# Altium PCB Rascal.PcbDoc (part 3 of 3)
Units mm, origin at the board's own origin, x right, y up, seen from the top; angles counter-clockwise.
Board outline 120.65 x 53.34 mm, 4 copper layers (Top Layer, Ground Plane, Power Plane, Bottom Layer); 125 components, 215 nets, 799 pads, 528 vias.
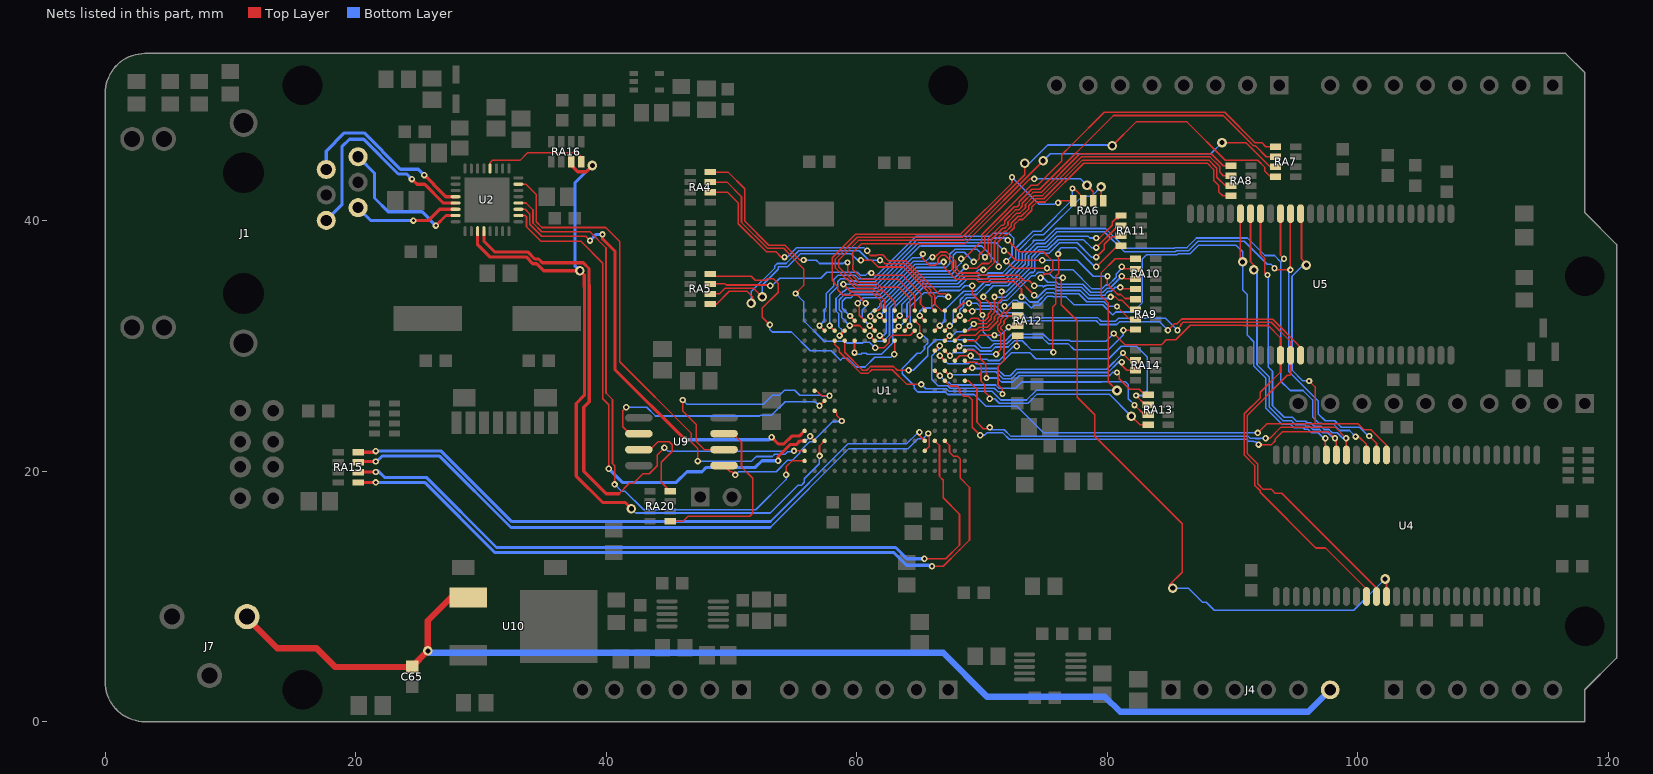
[diagram p5: the nets of this part, all layers, seen from the top]

## Via types
v1: diameter 0.508, hole 0.254, Top Layer to Bottom Layer, 343 vias
v2: diameter 0.762, hole 0.406, Top Layer to Bottom Layer, 170 vias
v3: diameter 0.66, hole 0.33, Top Layer to Bottom Layer, tented top, 9 vias
v4: diameter 2.3, hole 2.3, Top Layer to Bottom Layer, 4 vias
v5: diameter 1.524, hole 0.889, Top Layer to Bottom Layer, 2 vias

## Nets (pads, with @x,y where several pads share a name; then routed paths per layer and width w, separated by ;. In a path a pad name is that pad's centre, name@x,y a point inside that pad or via, vN(x,y) a via of type N, cw(c..) or ccw(c..) an arc to the next point about the centre after c; other vN are vias at no path point) (continued)
NetRA4_2: RA4.2 U1.E2 | length 28.3
  Top Layer w0.127: RA4.2@48.298,42.272 49.676,42.272 50.546,41.402 50.546,39.751 52.768,37.529 53.53,37.529 53.975,37.084 v1(54.229,37.084) ; v1(60.833,37.592) 60.833,37.465 61.087,37.211 61.601,37.211 61.665,37.274 62.068,37.274 62.538,36.805 63.924,36.805 66.566,34.163 67.056,34.163 v1(67.31,33.909) ; v1(65.024,32.416) 65.424,32.016 U1.E2@65.43,32.016
  Bottom Layer w0.127: v1(54.229,37.084) 54.445,37.084 55.207,37.846 60.579,37.846 v1(60.833,37.592) v1@60.833,37.465 ; v1@65.024,32.385 v1(65.024,32.416) 65.024,32.766 65.278,33.02 65.907,33.02 66.23,33.344 66.23,33.712 66.491,33.972 66.859,33.972 66.923,33.909 v1(67.31,33.909)
NetRA4_3: RA4.3 U1.F3 | length 26.9
  Top Layer w0.127: RA4.3@48.298,43.072 49.638,43.072 50.8,41.91 50.8,39.856 52.874,37.782 54.159,37.782 54.673,37.268 54.673,37.245 55.753,36.166 55.753,34.819 v1(55.118,34.184) ; v1(61.468,29.845) 62.18,29.845 62.598,30.263 62.598,30.594 62.852,30.848 64.262,30.848 U1.F3@64.63,31.216
  Bottom Layer w0.127: v1(55.118,34.184) 55.753,33.549 55.753,32.025 57.4,30.378 ; 57.4,30.374 58.267,30.374 58.27,30.371 59.054,30.371 59.199,30.226 60.458,30.226 60.522,30.29 61.023,30.29 v1(61.468,29.845) v1@61.329,29.845
NetRA4_4: RA4.4 U1.G2 | length 24
  Top Layer w0.127: RA4.4@48.298,43.872 49.727,43.872 51.054,42.545 51.054,39.961 52.979,38.036 54.264,38.036 55.471,36.83 v1@55.753,36.83 ; v1(59.263,36.657) 59.263,35.987 59.334,35.916 59.338,35.916 59.896,35.358 59.896,35.354 60.198,35.052 61.53,35.052 61.911,34.671 63.373,34.671 64.23,33.814 64.23,32.416 U1.G2@63.83,32.016
  Bottom Layer w0.127: v1@55.753,36.83 56.769,36.83 57.023,36.576 58.928,36.576 59.009,36.657 v1(59.263,36.657)
  other v1: 55.753,36.851
NetRA5_1: RA5.1 U1.C1 | length 25
  Top Layer w0.127: RA5.1@48.098,33.344 RA5.1@48.298,33.344 48.814,33.344 49.823,34.353 51.244,34.353 51.689,33.909 v2@51.689,33.528 ; v1(61.849,36.83) 61.976,36.83 62.255,36.551 63.819,36.551 65.913,34.457 65.913,34.335 66.23,34.017 66.23,33.344 66.758,32.816 U1.C1@67.03,32.816
  Bottom Layer w0.127: v2(51.562,33.401) 51.562,34.312 53.467,36.217 53.467,36.403 53.64,36.576 54.357,36.576 55.373,37.592 60.198,37.592 60.96,36.83 v1(61.849,36.83) v1@61.976,36.83
NetRA5_2: RA5.2 U1.D1 | length 22.9
  Top Layer w0.127: RA5.2@48.298,34.144 49.025,34.144 49.488,34.608 51.752,34.608 v2(52.451,33.909) ; v1(60.325,36.83) 61.172,36.83 61.705,36.297 63.714,36.297 65.659,34.352 65.659,34.23 65.977,33.912 65.977,33.069 U1.D1@66.23,32.816
  Bottom Layer w0.127: v2(52.451,33.909) 52.451,34.842 53.721,36.112 53.721,36.298 53.745,36.322 54.462,36.322 55.478,37.338 59.563,37.338 60.071,36.83 v1(60.325,36.83)
NetRA5_3: RA5.3 U1.E1 | length 20
  Top Layer w0.127: RA5.3@48.298,34.944 49.511,34.944 49.593,34.861 53.037,34.861 v1@53.086,34.813 ; v1(61.163,35.817) 61.163,35.763 61.087,35.687 61.138,35.636 63.656,35.636 65.151,34.141 65.151,33.776 65.087,33.712 65.087,33.34 65.43,32.998 U1.E1@65.43,32.816
  Bottom Layer w0.127: v1(53.086,34.798) 53.236,34.798 53.842,35.404 57.121,35.404 57.594,35.877 60.065,35.877 60.319,35.623 60.687,35.623 60.941,35.877 61.103,35.877 v1(61.163,35.817) ; v1@61.189,35.662 v1@61.214,35.687
NetRA5_4: RA5.4 U1.H4 | length 23
  Top Layer w0.127: RA5.4@48.304,35.56 51.584,35.56 51.901,35.242 52.722,35.242 52.849,35.369 53.323,35.369 53.721,34.971 53.721,34.29 52.451,33.02 52.451,32.294 v1(53.062,31.683) ; v1@63.03,29.375 U1.H4@63.03,30.416
  Bottom Layer w0.127: v1(53.062,31.683) 53.062,31.3 53.254,31.108 54.783,31.108 56.279,29.612 57.952,29.612 58.702,28.862 58.866,29.026 59.267,29.026 59.984,28.309 60.662,28.309 61.436,29.083 62.738,29.083 v1(62.992,29.337)
NetRA6_1: RA6.1 U1.H3 | length 23.6
  Top Layer w0.127: U1.H3@63.03,31.216 v1@63.353,31.539 ; v2(79.502,42.693) 79.502,41.772 RA6.1@79.686,41.588
  Bottom Layer w0.127: v1@63.43,31.553 64.008,32.131 64.008,33.364 65.353,34.708 68.171,34.708 68.769,35.306 70.042,35.306 70.106,35.369 70.393,35.369 70.584,35.56 71.739,35.56 72.943,36.764 72.943,37.637 74.189,38.883 74.93,38.883 77.978,41.931 78.74,41.931 v2(79.502,42.693)
  other v1: 63.348,31.545
NetRA6_2: RA6.2 U1.F1 | length 31.1
  Top Layer w0.127: 59.69,36.455 59.69,36.068 60.452,35.306 63.313,35.306 64.633,33.986 64.633,32.816 U1.F1@64.63,32.816 ; 59.69,36.858 59.69,37.465 60.389,38.163 68.644,38.163 73.808,43.328 v1(74.168,43.328) ; 59.707,36.473 59.707,36.841 ; v2(78.378,42.82) 78.886,42.312 RA6.2@78.886,41.588
  Bottom Layer w0.127: v1(74.168,43.328) 77.87,43.328 v2(78.378,42.82)
NetRA6_3: RA6.3 U1.H2 | length 21.1
  Top Layer w0.127: U1.H2@63.03,32.016 63.43,32.416 v1@63.433,32.413 ; v1(77.216,42.566) 77.364,42.418 77.491,42.418 RA6.3@77.978,41.931
  Bottom Layer w0.127: v1@63.433,32.413 63.43,32.416 63.579,32.565 63.579,33.294 65.247,34.962 68.066,34.962 68.663,35.56 69.596,35.56 69.659,35.623 70.288,35.623 70.479,35.814 71.633,35.814 72.689,36.869 72.689,37.785 74.041,39.137 74.676,39.137 77.216,41.677 v1(77.216,42.566)
  other v1: 63.433,32.416
NetRA6_4: RA6.4 U1.K3 | length 30.7
  Top Layer w0.127: 58.229,34.995 58.49,34.734 58.49,34.474 58.928,34.036 60.071,34.036 v1(60.706,33.401) ; 58.229,35.049 58.039,35.239 58.039,37.04 59.924,38.925 68.306,38.925 72.39,43.009 v1(72.39,43.455) ; v1(61.03,31.616) U1.K3@61.43,31.216 ; v1(76.073,41.423) 76.238,41.588 RA6.4@77.286,41.588
  Bottom Layer w0.127: 60.706,33.147 60.452,32.893 60.452,32.194 v1(61.03,31.616) ; v1(72.39,43.455) 74.549,41.296 75.819,41.296
NetRA7_1: RA7.1 U1.J4 | length 42.8
  Top Layer w0.127: v1(61.83,30.816) U1.J4@62.23,30.416 ; v1(68.326,36.957) 68.562,36.957 69.977,38.372 69.977,38.873 73.914,42.82 74.424,42.82 76.36,44.756 76.361,45.259 77.176,46.072 79.745,48.641 89.364,48.641 91.777,46.228 92.329,46.228 92.653,45.904 RA7.1@93.434,45.904
  Bottom Layer w0.127: v1(61.83,30.816) 62.116,30.816 62.357,31.057 62.357,33.149 64.932,35.724 67.579,35.724 67.962,36.107 67.962,36.254 68.326,36.618 v1(68.326,36.957)
NetRA7_2: RA7.2 U1.J2 | length 42.6
  Top Layer w0.127: v1(61.83,32.416) U1.J2@62.23,32.016 ; v1@69.428,36.617 69.787,36.975 69.787,37.268 70.231,37.713 70.231,38.768 72.569,41.106 72.813,41.106 72.962,41.254 72.962,41.498 73.966,42.503 74.612,42.503 80.497,48.387 89.259,48.387 91.672,45.974 91.821,45.974 92.691,45.104 RA7.2@93.434,45.104
  Bottom Layer w0.127: v1(61.83,32.416) 62.103,32.689 62.103,33.255 64.827,35.978 67.474,35.978 67.708,36.212 67.708,37.228 67.945,37.465 68.568,37.465 69.33,36.703 v1(69.342,36.703)
NetRA7_3: RA7.3 U1.H1 | length 46.6
  Top Layer w0.127: U1.H1@63.03,32.816 U1.H1@63.03,32.931 ; U1.H1@63.066,32.816 63.066,33.454 62.103,34.417 61.805,34.417 61.424,34.798 60.071,34.798 59.642,35.227 59.642,35.252 59.233,35.662 59.207,35.662 58.547,36.322 58.547,36.83 60.134,38.417 68.516,38.417 v2(74.876,44.777) ; v2(89.154,46.228) 91.059,46.228 92.983,44.304 RA7.3@93.434,44.304
  Bottom Layer w0.127: v2(74.876,44.777) 75.438,45.339 88.265,45.339 v2(89.154,46.228)
NetRA7_4: RA7.4 U1.J1 | length 48.8
  Top Layer w0.127: U1.J1@62.23,32.816 62.219,32.805 62.219,33.666 61.722,34.163 61.7,34.163 61.319,34.544 59.966,34.544 59.388,35.121 59.388,35.147 59.128,35.408 59.102,35.408 58.293,36.217 58.293,36.935 60.029,38.672 68.411,38.672 73.406,43.666 v2(73.406,44.577) ; v2(80.391,45.974) 82.296,47.879 86.36,47.879 89.419,44.82 90.407,44.82 90.41,44.817 90.946,44.817 90.949,44.82 92.007,44.82 92.583,44.244 92.583,43.942 93.021,43.504 RA7.4@93.434,43.504
  Bottom Layer w0.127: v2(73.406,44.577) 73.787,44.577 75.248,46.038 80.328,46.038 v2(80.391,45.974)
NetRA8_1: RA8.1 U1.K2 | length 37.6
  Top Layer w0.127: v1@61.043,32.414 61.032,32.414 U1.K2@61.43,32.016 ; v1@70.116,36.945 70.485,37.314 70.485,38.576 71.553,39.644 71.71,39.644 71.819,39.752 71.819,39.996 72.674,40.852 72.928,40.852 73.215,41.139 73.215,41.393 74.071,42.249 74.718,42.249 77.808,45.339 88.305,45.339 89.264,44.38 RA8.1@89.878,44.38
  Bottom Layer w0.127: v1@61.03,32.416 61.032,32.414 v1@61.043,32.414 ; v1@61.116,32.331 61.116,32.627 61.429,32.94 61.584,32.94 61.844,33.2 61.844,33.355 64.748,36.258 67.113,36.258 67.428,36.573 67.428,37.307 67.84,37.719 69.596,37.719 v1(70.231,37.084)
  other v1: 61.087,32.36
NetRA8_2: RA8.2 U1.K4 | length 39.3
  Top Layer w0.127: v1@61.045,30.812 61.043,30.814 v1(61.03,30.812) U1.K4@61.468,30.378 ; v1(68.707,36.322) 68.834,36.195 69.596,36.195 69.977,36.576 70.55,36.576 70.739,36.765 70.739,38.471 71.658,39.39 71.816,39.39 72.072,39.647 72.072,39.891 72.779,40.598 73.033,40.598 73.469,41.034 73.469,41.288 74.176,41.995 74.823,41.995 77.913,45.085 88.2,45.085 88.99,44.295 88.99,43.852 89.262,43.58 RA8.2@89.878,43.58
  Bottom Layer w0.127: v1@61.045,30.812 61.043,30.814 v1(61.03,30.812) 61.493,30.353 62.103,30.353 62.611,30.861 62.611,33.044 65.037,35.47 67.855,35.47 v1(68.707,36.322)
NetRA8_3: RA8.3 U1.M4 | length 41.8
  Top Layer w0.127: U1.M4@59.83,30.416 59.817,30.429 v1(59.817,29.464) v1@59.944,29.591 ; v1(70.104,36.068) 70.402,36.068 70.993,36.659 70.993,38.366 71.763,39.136 71.921,39.136 72.326,39.542 72.326,39.786 72.884,40.344 73.138,40.344 73.724,40.929 73.724,41.183 74.281,41.741 74.928,41.741 78.019,44.831 88.094,44.831 88.736,44.189 88.736,43.471 89.427,42.78 RA8.3@89.878,42.78
  Bottom Layer w0.127: v1(59.817,29.464) 59.944,29.337 60.331,29.337 60.395,29.4 60.763,29.4 60.827,29.337 61.976,29.337 62.865,30.226 62.865,32.939 65.142,35.216 67.96,35.216 68.558,35.814 69.463,35.814 69.717,36.068 v1@70.021,36.068
NetRA8_4: RA8.4 U1.N3 | length 44.8
  Top Layer w0.127: v1(58.63,30.816) U1.N3@59.03,31.216 ; v1@71.23,36.212 71.23,36.537 71.247,36.554 71.247,38.261 71.868,38.882 72.026,38.882 72.581,39.436 72.581,39.68 72.99,40.09 73.244,40.09 73.977,40.823 73.977,41.077 74.387,41.487 75.033,41.487 78.124,44.577 87.989,44.577 88.482,44.084 88.482,43.217 88.9,42.799 88.9,42.291 89.211,41.98 RA8.4@89.878,41.98 ; v1(71.336,36.322) 71.336,36.233 v1@71.374,36.195
  Bottom Layer w0.127: v1(58.63,30.816) 58.801,30.987 58.801,31.3 58.547,31.554 58.547,32.581 58.34,32.787 58.34,33.78 58.914,34.353 58.991,34.353 59.245,34.608 61.292,34.608 61.295,34.611 61.663,34.611 65.025,37.972 ; 65.107,37.973 69.971,37.973 70.675,37.268 70.675,37.148 v1@71.374,36.449
NetRA9_1: RA9.1 U1.K1 | length 31.9
  Top Layer w0.127: v1@58.801,35.052 v1(58.928,34.925) 59.563,34.29 61.214,34.29 61.965,33.539 61.965,33.072 61.754,32.86 61.646,32.86 61.601,32.816 U1.K1@61.43,32.816 ; v1(71.755,37.592) 71.927,37.592 72.689,36.83 v1(74.803,36.83) ; v1(80.01,35.56) 80.01,34.925 80.831,34.104 81.085,34.104 81.407,33.782 RA9.1@82.258,33.782
  Bottom Layer w0.127: v1(58.928,34.925) 59.861,34.925 59.924,34.861 61.186,34.861 61.19,34.865 61.558,34.865 64.92,38.227 71.12,38.227 v1(71.755,37.592) ; v1(74.803,36.83) 77.597,36.83 78.867,35.56 v1(80.01,35.56)
NetRA9_2: RA9.2 U1.L3 | length 33
  Top Layer w0.127: v1@59.436,31.623 60.223,31.623 U1.L3@60.63,31.216 ; v1(65.278,37.338) 65.278,36.957 65.786,36.449 66.294,36.449 66.484,36.639 66.484,36.96 66.761,37.236 67.052,37.236 67.627,36.661 67.627,36.131 68.199,35.56 69.624,35.56 69.815,35.369 72.834,35.369 v1(74.168,34.036) ; v1(80.264,33.909) 80.645,33.909 80.899,33.655 81.153,33.655 81.896,32.912 RA9.2@82.258,32.912
  Bottom Layer w0.127: v1@59.443,31.616 58.801,32.258 58.801,32.686 58.594,32.892 58.594,33.674 59.02,34.099 59.349,34.099 59.603,34.353 61.397,34.353 61.4,34.357 61.768,34.357 64.432,37.02 65.039,37.02 65.103,37.084 65.278,37.084 v1(65.278,37.338) ; v1(74.168,34.036) 74.358,33.846 74.402,33.846 75.083,34.527 75.128,34.527 75.15,34.548 75.211,34.548 75.237,34.575 75.738,34.575 75.896,34.417 77.835,34.417 78.47,33.782 80.162,33.782 v1@80.264,33.884
  other v1: 59.436,31.616
NetRA9_3: RA9.3 U1.L2 | length 28.6
  Top Layer w0.127: v1(60.071,33.401) 60.202,33.27 60.202,32.444 U1.L2@60.63,32.016 ; v1(73.152,33.909) 73.152,34.544 72.581,35.115 69.709,35.115 69.519,35.306 67.945,35.306 66.929,36.322 v1(66.929,36.703) v1@66.929,36.776 ; v1(80.772,33.147) 81.807,32.112 RA9.3@82.258,32.112 ; v1@66.929,36.776 66.967,36.738 66.967,36.792 66.929,36.83 v1@66.929,36.776
  Bottom Layer w0.127: v1(60.071,33.401) 60.401,33.731 60.408,33.731 60.522,33.846 61.607,33.846 61.61,33.849 61.979,33.849 64.642,36.512 65.627,36.512 65.691,36.576 66.735,36.576 v1@66.929,36.77 ; v1(66.929,36.703) v1@66.929,36.77 ; v1@66.929,36.83 v1@66.929,36.77 ; v1@73.279,34.036 73.812,33.503 74.463,33.503 ; 74.489,33.528 74.489,33.567 75.149,34.227 75.727,34.227 75.791,34.163 77.73,34.163 78.365,33.528 79.743,33.528 80.124,33.147 v1(80.772,33.147)
NetRA9_4: RA9.4 U1.N4 | length 28.4
  Top Layer w0.127: U1.N4@59.03,30.416 59.03,29.489 60.464,28.055 60.796,28.055 61.095,28.354 62.937,28.354 63.236,28.055 v1(64.135,28.055) ; v1(81.28,31.242) 82.188,31.242 RA9.4@82.258,31.312
  Bottom Layer w0.127: v1(64.135,28.055) 64.504,28.055 65.659,29.21 65.659,29.845 66.294,30.48 67.056,30.48 67.183,30.353 67.691,30.353 67.818,30.48 69.32,30.48 69.955,29.845 70.64,29.845 70.958,30.162 71.974,30.162 72.482,30.67 74.789,30.67 75.276,30.184 76.87,30.184 77.369,29.685 80.104,29.685 81.28,30.861 v1(81.28,31.242)
NetRA10_1: RA10.1 U1.P4 | length 38.5
  Top Layer w0.127: U1.P4@58.23,30.416 58.23,30.137 58.598,29.769 58.598,29.54 60.337,27.801 60.901,27.801 61.2,28.1 62.832,28.1 64.008,26.924 v1(65.151,26.924) ; v2(80.772,26.437) 80.073,27.136 80.073,33.421 79.502,33.992 79.502,35.814 80.632,36.944 RA10.1@82.258,36.944
  Bottom Layer w0.127: v1(65.151,26.924) 65.507,26.568 67.162,26.568 67.36,26.371 70.791,26.371 71.486,25.675 73.554,25.675 74.32,26.441 80.747,26.441 v2@80.772,26.416
NetRA10_2: RA10.2 U1.R3 | length 35.3
  Top Layer w0.127: v1@57.032,31.614 U1.R3@57.43,31.216 ; v1(71.945,36.754) 72.503,36.195 v1(75.184,36.195) ; v1(81.153,36.322) 81.331,36.144 RA10.2@82.258,36.144
  Bottom Layer w0.127: v1(57.023,31.614) 57.404,31.995 57.404,32.893 57.576,33.065 57.576,34.193 58.166,34.783 58.166,35.306 58.483,35.623 59.88,35.623 60.134,35.369 60.976,35.369 ; 60.979,35.373 61.347,35.373 64.71,38.735 70.612,38.735 70.866,38.989 72.136,38.989 72.517,38.608 72.517,38.1 72.39,37.973 72.39,37.199 v1(71.945,36.754) ; v1@75.184,36.09 77.24,36.09 78.785,34.544 79.552,34.544 79.869,34.861 80.095,34.861 80.709,35.475 80.709,35.744 81.153,36.189 v1(81.153,36.322)
NetRA10_3: RA10.3 U1.P3 | length 34.6
  Top Layer w0.127: v1(57.83,31.616) U1.P3@58.23,31.216 ; v1(72.052,38.438) 72.98,37.51 74.885,37.51 75.629,36.767 75.629,36.011 75.368,35.75 75,35.75 74.997,35.754 v1(74.676,35.433) ; v1(81.153,35.56) 81.369,35.344 RA10.3@82.258,35.344
  Bottom Layer w0.127: v1(57.83,31.616) 57.83,34.087 58.483,34.741 58.483,35.109 58.522,35.147 58.522,35.183 58.67,35.331 58.674,35.331 58.674,35.369 59.245,35.369 59.436,35.179 59.966,35.179 60.029,35.115 61.081,35.115 61.084,35.119 61.453,35.119 64.815,38.481 70.739,38.481 70.866,38.608 71.882,38.608 v1(72.052,38.438) ; v1(74.676,35.433) 74.892,35.433 75.242,35.083 75.949,35.083 76.106,34.925 78.045,34.925 78.68,34.29 79.657,34.29 79.975,34.608 80.2,34.608 v1(81.153,35.56)
NetRA10_4: RA10.4 U1.M2 | length 28.5
  Top Layer w0.127: v1@59.463,32.383 U1.M2@59.83,32.016 ; v1@66.269,37.104 66.655,37.49 67.158,37.49 67.882,36.767 67.882,36.237 68.304,35.814 69.729,35.814 69.92,35.623 72.94,35.623 73.359,35.204 73.762,35.204 v1(74.168,34.798) ; v1(81.026,34.671) 81.153,34.544 RA10.4@82.258,34.544
  Bottom Layer w0.127: 59.284,32.562 58.848,32.997 58.848,33.569 59.125,33.846 59.532,33.846 59.786,34.099 61.502,34.099 ; 61.505,34.103 61.873,34.103 64.537,36.767 65.522,36.767 v1@65.84,37.084 ; v1(74.168,34.798) 74.803,34.798 74.899,34.702 74.978,34.781 75.023,34.781 75.045,34.802 75.106,34.802 75.132,34.829 75.844,34.829 76.001,34.671 77.94,34.671 78.575,34.036 79.819,34.036 79.819,34.093 80.08,34.353 80.306,34.353 80.623,34.671 v1(81.026,34.671)
  other v1: 59.468,32.388 66.04,37.084
NetRA11_1: RA11.1 U1.A2 | length 18.2
  Top Layer w0.127: U1.A2@68.63,32.016 68.979,32.016 69.158,32.194 69.659,32.194 69.85,32.004 70.209,32.004 70.485,32.28 70.485,32.524 70.739,32.778 70.739,33.274 v1(70.104,33.909) ; v1(79.121,38.608) 79.375,38.608 80.391,39.624 80.391,39.878 80.666,40.153 RA11.1@80.899,40.153
  Bottom Layer w0.127: v1@70.074,33.973 70.328,34.227 70.899,34.798 72.054,34.798 73.705,36.449 73.705,37.179 74.442,37.916 75.15,37.916 75.969,38.735 78.486,38.735 78.613,38.608 v1(79.121,38.608)
NetRA11_2: RA11.2 U1.A3 | length 18.1
  Top Layer w0.127: U1.A3@68.63,31.216 68.935,31.216 69.025,31.305 69.576,31.305 69.767,31.496 70.42,31.496 70.993,32.069 70.993,32.313 71.247,32.567 71.247,33.398 71.564,33.715 71.564,34.227 v1@71.501,34.29 ; v1(79.121,37.846) 80.791,39.516 RA11.2@81.242,39.516
  Bottom Layer w0.127: v1@71.501,34.29 71.906,34.29 73.959,36.343 73.959,37.074 74.547,37.662 75.255,37.662 76.074,38.481 78.105,38.481 78.74,37.846 v1(79.121,37.846)
  other v1: 71.564,34.341
NetRA11_3: RA11.3 U1.C4 | length 20.8
  Top Layer w0.127: U1.C4@67.03,30.416 v1@67.419,30.805 ; v1@69.215,31.75 v1(69.342,31.75) ; v1@69.253,31.788 69.342,31.788 v1(69.342,31.75) ; v1(70.993,33.909) 70.993,32.672 70.739,32.418 70.739,32.175 70.314,31.75 v1(69.342,31.75) ; v1(79.121,37.084) 79.756,37.719 79.756,38.122 80.35,38.716 RA11.3@81.242,38.716
  Bottom Layer w0.127: v1@67.425,30.8 67.63,30.8 67.945,31.115 68.707,31.115 v1(69.342,31.75) ; v1(70.993,33.909) 70.993,33.718 71.158,33.884 71.878,33.884 73.85,35.855 74.1,35.855 74.213,35.968 74.213,36.968 74.652,37.408 75.36,37.408 76.18,38.227 77.597,38.227 78.74,37.084 v1(79.121,37.084)
  other v1: 67.412,30.8
NetRA11_4: RA11.4 U1.B5 | length 23.7
  Top Layer w0.127: U1.B5@67.83,29.616 v1@68.223,30.009 ; v1(75.692,29.485) 75.629,29.549 75.629,33.09 75.882,33.344 75.882,35.546 76.136,35.8 76.136,36.977 76.098,37.015 76.098,37.037 76.073,37.062 v1(76.073,37.338) ; v1(79.121,36.322) 79.14,36.322 80.734,37.916 RA11.4@81.242,37.916
  Bottom Layer w0.127: v1@68.23,30.016 69.425,30.016 69.85,29.591 70.745,29.591 71.063,29.909 72.079,29.909 72.587,30.416 73.215,30.416 73.956,29.676 75.501,29.676 v1(75.692,29.485) ; v1(76.073,37.338) 76.073,37.592 76.327,37.846 77.47,37.846 v1@78.994,36.322
  other v1: 68.203,29.978
NetRA12_1: RA12.1 U1.C5 | length 9.9
  Top Layer w0.127: U1.C5@67.03,29.616 67.43,29.216 v1(67.437,29.216) ; v1(71.12,29.337) 71.501,29.718 71.501,31.01 71.247,31.264 71.247,31.605 71.501,31.859 71.501,32.103 71.987,32.589 71.987,32.722 72.469,33.204 73.063,33.204 RA12.1@73.114,33.204
  Bottom Layer w0.127: v1(67.437,29.216) 67.685,29.464 68.58,29.464 68.834,29.718 69.342,29.718 69.723,29.337 v1(71.12,29.337)
NetRA12_2: RA12.2 U1.D5 | length 17.7
  Top Layer w0.127: U1.D5@66.23,29.616 v1@66.63,30.016 ; v1(71.628,26.162) 71.628,26.543 71.272,26.899 71.272,28.346 71.755,28.829 71.755,31.115 71.501,31.369 71.501,31.5 71.755,31.754 71.755,31.998 72.142,32.385 RA12.2@73.114,32.385
  Bottom Layer w0.127: v1@66.636,30.011 66.636,29.791 66.506,29.66 66.452,29.66 65.97,29.178 65.97,27.342 66.49,26.822 67.267,26.822 67.465,26.625 70.974,26.625 71.246,26.352 71.564,26.352 71.628,26.289 v1(71.628,26.162)
  other v1: 66.624,30.011
NetRA12_3: RA12.3 U1.A4 | length 5.2
  Top Layer w0.127: U1.A4@68.63,30.416 69.487,30.416 69.723,30.652 69.723,30.734 69.825,30.836 ; 69.856,30.861 v1(70.993,30.861) ; v1(72.136,31.496) 72.244,31.604 73.063,31.604 RA12.3@73.114,31.604
  Bottom Layer w0.127: v1(70.993,30.861) 71.501,30.861 v1@72.274,31.634
NetRA12_4: RA12.4 U1.B6 | length 6.5
  Top Layer w0.127: U1.B6@67.83,28.816 68.224,29.21 v1(69.088,29.21) ; 72.771,30.226 72.806,30.261 72.806,30.804 RA12.4@72.806,31.004
  Bottom Layer w0.127: v1@69.088,29.185 69.329,28.943 70.371,28.943 70.485,28.829 71.374,28.829 72.517,29.972 v1(72.771,29.972)
NetRA13_1: RA13.1 U1.A5 | length 17.8
  Top Layer w0.127: U1.A5@68.63,29.616 68.865,29.616 68.904,29.654 69.272,29.654 69.311,29.616 69.444,29.616 69.85,29.21 69.85,28.978 70.294,28.533 70.294,27.877 70.358,27.813 v1(70.358,27.432) ; v1(80.772,27.877) 80.962,27.877 80.962,27.368 81.788,26.543 82.55,26.543 83.001,26.092 RA13.1@83.274,26.092
  Bottom Layer w0.127: v1(70.358,27.432) 71.244,27.432 71.562,27.114 72.456,27.114 72.964,27.622 80.157,27.622 80.411,27.877 v1(80.772,27.877)
NetRA13_2: RA13.2 U1.C6 | length 23.8
  Top Layer w0.127: v1(66.636,29.216) 67.03,28.822 U1.C6@67.03,28.816 ; v1(82.296,26.035) 83.039,25.292 RA13.2@83.274,25.292
  Bottom Layer w0.127: v1(66.636,29.216) 67.277,28.575 68.917,28.575 69.031,28.689 69.399,28.689 69.513,28.575 71.479,28.575 72.37,29.466 73.807,29.466 74.296,28.977 80.114,28.977 81.109,29.972 82.321,29.972 83.185,29.108 83.185,26.416 82.804,26.035 v1(82.296,26.035)
NetRA13_3: RA13.3 U1.D7 | length 19.8
  Top Layer w0.127: U1.D7@66.23,28.016 66.63,27.616 v1(66.636,27.616) ; v1@82.292,25.15 v1(82.169,25.273) 82.95,24.492 RA13.3@83.274,24.492
  Bottom Layer w0.127: v1(66.636,27.616) 67.176,27.076 67.373,27.076 67.57,26.879 71.079,26.879 71.351,26.607 72.667,26.607 73.175,27.114 79.512,27.114 79.539,27.141 81.444,27.141 81.661,26.924 81.661,25.781 v1(82.169,25.273)
NetRA13_4: RA13.4 U1.A6 | length 18.5
  Top Layer w0.127: U1.A6@68.63,28.816 68.744,28.702 69.596,28.702 69.952,28.346 69.952,27.908 69.913,27.87 69.913,27.248 69.952,27.21 69.952,27.158 70.231,26.879 70.231,26.289 70.485,26.035 ; v2@82.121,24.59 v2(81.915,24.384) 82.607,23.692 RA13.4@83.274,23.692
  Bottom Layer w0.127: v1(70.612,25.781) 71.021,25.781 71.381,25.421 73.659,25.421 74.388,26.15 80.149,26.15 v2(81.915,24.384)
NetRA14_2: RA14.2 U1.A7 | length 15
  Top Layer w0.127: U1.A7@68.63,28.016 68.808,28.194 v1@69.215,28.194 ; v1(81.249,29.433) 81.249,29.368 81.769,28.848 RA14.2@82.258,28.848
  Bottom Layer w0.127: v1@69.215,28.194 71.201,28.194 71.772,27.622 72.246,27.622 72.754,28.13 79.947,28.13 v1(81.249,29.433)
  other v1: 69.215,28.245
NetRA14_3: RA14.3 U1.C7 | length 16.7
  Top Layer w0.127: U1.C7@67.03,28.016 67.43,27.616 v1(67.437,27.616) ; v1(81.153,28.702) 81.153,28.448 81.553,28.048 RA14.3@82.258,28.048
  Bottom Layer w0.127: v1(67.437,27.616) 67.507,27.686 69.783,27.686 70.037,27.94 71.096,27.94 71.667,27.368 72.351,27.368 72.859,27.877 80.052,27.877 80.877,28.702 v1(81.153,28.702)
NetRA15_5: RA15.5 U1.C14 | length 61.4
  Top Layer w0.127: v1(66,12.4) 66.9,12.4 68.2,13.7 69,14.5 69,18.7 68.254,19.446 68.254,20.96 68.014,21.2 67.7,21.2 67.4,21.5 67.4,22.046 U1.C14@67.03,22.416
  Top Layer w0.254: RA15.5@20.2,19.1 v1(21.6,19.1)
  Bottom Layer w0.254: v1(21.6,19.1) 25.5,19.1 31.1,13.5 62.961,13.5 63.969,12.492 65.746,12.492 65.919,12.319 v1(66,12.4)
NetRA15_6: RA15.6 U1.D14 | length 60.6
  Top Layer w0.127: v1(65.4,13) 67.1,13 68.2,14.1 68.2,16.564 66.9,17.864 66.9,19.275 66.6,19.575 66.6,22.046 U1.D14@66.23,22.416
  Top Layer w0.254: RA15.6@20.2,19.9 20.233,19.933 v1(21.6,19.933)
  Bottom Layer w0.254: v1@21.6,19.8 21.8,20 22.3,19.5 25.639,19.5 31.239,13.9 63.1,13.9 64,13 v1(65.4,13)
NetRA15_7: RA15.7 U1.E15 | length 52.8
  Top Layer w0.127: U1.E15@65.43,21.616 65.8,21.986 65.8,22.9 v1(65.7,23)
  Top Layer w0.254: RA15.7@20.2,20.7 20.267,20.767 v1(21.6,20.767)
  Bottom Layer w0.127: 53.081,15.5 59.381,21.8 64.1,21.8 64.9,22.6 65.3,22.6 v1(65.7,23)
  Bottom Layer w0.254: v1@21.6,20.7 22.1,21.2 26.7,21.2 32.4,15.5 53.081,15.5
NetRA15_8: RA15.8 U1.E14 | length 50.6
  Top Layer w0.127: v1@21.5,21.5 v1(21.6,21.6) ; v1@64.946,22.9 U1.E14@65.43,22.416
  Top Layer w0.254: RA15.8@20.2,21.5 v1@21.5,21.5
  Bottom Layer w0.127: 53.095,15.969 59.324,22.198 63.998,22.198 v1@64.8,23
  Bottom Layer w0.254: v1(21.6,21.6) 26.839,21.6 32.47,15.969 53.095,15.969
  other v1: 65,23.1
NetRA16_7: RA16.7 U1.R14 U2.11 | length 62.5
  Top Layer w0.127: v1@57.023,21.23 57.023,22.009 U1.R14@57.43,22.416
  Top Layer w0.254: U2.11@29.73,39.156 29.73,38.07 30.7,37.1 33.6,37.1 34.143,36.557 34.443,36.557 35.001,35.999 v2(37.901,35.999) 38.239,35.661 38.239,34.695 38.255,34.679 38.255,26.055 37.6,25.4 37.6,19.6 39.7,17.5 41.5,17.5 v2(42,17) ; RA16.7@37.27,44.344 37.714,43.9 38.4,43.9 v2(38.9,44.4)
  Bottom Layer w0.127: v2(42,17) 42.342,16.658 53.085,16.658 55.287,18.86 55.556,18.86 55.816,19.12 55.816,19.389 57.012,20.585 v1@57.012,21.23
  Bottom Layer w0.254: v2(37.901,35.999) 37.5,36.4 37.5,43 v2(38.9,44.4)
  other v1: 57.036,21.217
NetRA16_8: RA16.8 U2.28 | length 8.6
  Top Layer w0.127: U2.28@30.73,44.156 30.73,44.636 30.9,44.806 33.106,44.806 33.7,45.4 37.7,45.4 38,45.1 RA16.8@38,44.7
NetRA20_5: RA20.5 U9.7 | length 15.4
  Top Layer w0.127: RA20.5@45.1,16 46.131,16 46.531,16.4 51.452,16.4 51.689,16.637 51.689,19.434 50.8,20.323 50.8,22.308 50.1,23.008 U9.7@49.2,23.008 ; U9.7@49.185,22.987 U9.7@49.849,22.987
NetRA20_8: RA20.8 U9.3 | length 8.1
  Top Layer w0.127: U9.3@41.594,21.738 U9.3@42.102,21.738 ; U9.3@42.385,21.717 43.499,21.717 44.134,22.352 45.023,22.352 45.277,22.098 45.277,21.59 44.388,20.701 44.388,19.112 RA20.8@45.1,18.4
NetU1_A1: U1.A1 U5.39 | length 30.5
  Top Layer w0.127: U1.A1@68.63,32.816 69.265,32.816 v1@69.342,32.893 ; v1@69.215,32.639 v1(69.215,32.766) ; v1(84.836,31.242) 85.344,31.75 85.551,31.75 85.946,32.145 91.085,32.145 91.099,32.131 93.196,32.131 95.428,29.899 U5.39@95.428,28.894
  Bottom Layer w0.127: v1@69.215,32.639 v1@69.215,32.677 ; v1(69.215,32.766) v1@69.215,32.677 ; v1(84.836,31.242) 84.138,31.941 80.991,31.941 80.758,31.708 79.416,31.708 79.119,32.004 73.428,32.004 73.047,32.385 71.501,32.385 70.955,32.931 69.469,32.931 v1@69.215,32.677
NetU1_A8: U1.A8 U4.20 U5.20 | length 58.8
  Top Layer w0.127: U1.A8@68.63,27.216 68.923,27.216 69.596,26.543 69.596,23.897 70.104,23.389 70.612,23.389 v1(70.612,23.495) ; U5.20@92.228,40.194 92.228,37.312 92.583,36.957 92.583,35.814 92.736,35.661 v1(92.79,35.661) ; v1(92.635,22.627) 92.985,22.627 93.874,23.516 98.171,23.516 v1(99.06,22.627) 99.06,21.318 U4.20@99.086,21.292
  Bottom Layer w0.127: v1(70.612,23.495) 70.612,23.389 70.697,23.304 71.772,23.304 72.28,22.796 91.227,22.796 91.396,22.627 91.806,22.627 91.827,22.606 92.196,22.606 92.217,22.627 v1(92.635,22.627) ; 92.583,35.814 v1@92.736,35.661 ; v1(92.79,35.661) v1@92.736,35.661 ; v1(99.06,22.627) 98.8,22.627 98.355,23.072 97.952,23.072 97.698,23.326 97.296,23.326 97.042,23.58 96.512,23.58 96.239,23.853 95.969,23.853 95.844,23.978 95.107,23.978 94.791,24.294 94.12,24.294 93.185,25.229 93.185,27.973 92.837,28.321 92.837,35.56 v1@92.736,35.661
NetU1_B1: U1.B1 U4.38 U5.38 | length 56.1
  Top Layer w0.127: U1.B1@67.83,32.816 67.868,32.816 68.453,33.401 v1(68.961,33.401) ; v1@85.471,31.242 85.661,31.432 85.681,31.432 85.852,31.604 85.852,31.692 86.051,31.891 90.98,31.891 90.994,31.877 93.091,31.877 94.628,30.34 94.628,27.699 94.573,27.644 94.364,27.644 91.186,24.466 91.186,21.388 92.011,20.562 92.011,18.986 92.456,18.542 93.112,18.542 93.232,18.422 93.232,18.393 93.381,18.244 93.918,18.244 101.473,10.689 U4.38@101.473,10.181
  Bottom Layer w0.127: v1@69.088,33.274 v1(68.961,33.401) 69.59,33.401 69.805,33.185 71.082,33.185 71.628,32.639 73.152,32.639 73.533,32.258 79.225,32.258 79.521,31.962 80.653,31.962 80.885,32.194 84.645,32.194 v1(85.598,31.242)
NetU1_B2: U1.B2 U4.39 | length 60.7
  Top Layer w0.127: U1.B2@67.83,32.016 v1(68.23,32.416) ; v1(76.454,35.433) 76.581,35.433 76.327,35.179 76.327,33.274 77.597,32.004 77.597,25.908 78.994,24.511 78.994,22.78 85.979,15.795 85.979,11.938 v2@84.963,10.922 ; v2(102.171,11.388) 102.286,11.273 U4.39@102.286,9.992
  Bottom Layer w0.127: v1(68.23,32.416) 68.23,32.879 68.542,33.191 ; 68.516,33.217 68.516,33.585 68.777,33.846 69.504,33.846 69.911,33.439 71.447,33.439 71.638,33.63 71.984,33.63 73.955,35.601 74.231,35.601 ; 74.231,35.617 74.492,35.877 74.873,35.877 75,35.75 75.368,35.75 75.382,35.764 75.713,35.433 v1@76.581,35.433 ; v2(85.226,10.659) 86.473,10.659 87.607,9.525 87.905,9.525 88.54,8.89 99.674,8.89 v2(102.171,11.388)
NetU1_B4: U1.B4 U4.22 U5.22 | length 54.6
  Top Layer w0.127: U1.B4@67.83,30.416 68.26,30.846 69.476,30.846 69.872,31.242 70.525,31.242 71.247,31.964 71.247,32.208 71.733,32.694 71.733,33.058 71.793,33.118 v1(71.793,33.156) ; U5.22@90.628,40.194 90.628,36.88 v2(90.805,36.703) ; v1(97.409,22.627) 97.409,21.369 U4.22@97.486,21.292
  Bottom Layer w0.127: v1(71.793,33.156) 71.793,33.118 71.98,33.118 72.517,33.655 72.777,33.655 72.968,33.465 73.491,33.465 73.936,33.02 74.164,33.249 74.569,33.249 74.993,33.674 74.993,33.712 75.254,33.972 75.622,33.972 75.686,33.909 76.708,33.909 77.343,33.274 79.638,33.274 80.442,32.47 80.675,32.703 82.049,32.703 82.804,33.458 82.804,36.957 83.121,37.274 85.55,37.274 85.613,37.338 86.59,37.338 87.288,38.036 90.28,38.036 90.805,37.511 v2(90.805,36.703) 90.805,34.463 91.186,34.082 91.186,30.843 91.694,30.335 91.694,28.386 92.66,27.42 92.66,25.027 93.925,23.762 94.602,23.762 94.894,23.47 95.634,23.47 95.759,23.345 96.028,23.345 96.301,23.072 96.831,23.072 97.276,22.627 v1(97.409,22.627)
NetU1_C3: U1.C3 U4.17 U5.17 | length 57.2
  Top Layer w0.127: U1.C3@67.03,31.216 v1@67.421,31.607 ; v1(93.345,36.195) 93.472,36.068 v1(94.615,36.068) 94.615,40.181 U5.17@94.628,40.194 ; v1(100.91,22.809) 101.486,22.233 U4.17@101.486,21.292
  Bottom Layer w0.127: v1(67.415,31.598) 67.691,31.873 67.691,32.699 68.263,33.271 68.263,33.69 68.672,34.099 69.554,34.099 70.316,34.861 70.604,34.861 70.794,35.052 71.949,35.052 73.451,36.554 73.451,37.284 74.337,38.17 75.045,38.17 75.991,39.116 79.756,39.116 81.343,37.529 85.445,37.529 85.508,37.592 86.484,37.592 87.246,38.354 90.932,38.354 92.773,36.512 93.074,36.512 v1@93.368,36.218 ; v1(94.615,36.068) 94.488,35.941 94.488,27.951 96.845,25.594 96.845,24.569 97.39,24.024 98.157,24.024 98.536,23.645 98.685,23.496 100.145,23.496 100.832,22.809 v1(100.91,22.809)
NetU1_C8: U1.C8 U4.21 U5.21 | length 58.1
  Top Layer w0.127: U1.C8@67.03,27.216 67.449,26.797 68.019,26.797 68.199,26.617 68.199,26.31 68.516,25.993 68.897,25.993 69.215,25.675 69.215,23.495 v1(69.85,22.86) ; U5.21@91.428,40.194 91.428,36.715 91.694,36.449 ; v1(92.075,22.119) 93.106,22.119 93.408,22.422 93.408,22.564 93.98,23.135 97.663,23.135 v1(98.171,22.627) 98.286,22.512 U4.21@98.286,21.292
  Bottom Layer w0.127: v1(69.85,22.86) 69.913,22.924 69.956,22.881 70.207,22.881 70.376,23.05 71.667,23.05 72.175,22.543 91.122,22.543 91.291,22.373 91.701,22.373 91.722,22.352 91.842,22.352 v1(92.075,22.119) ; v2@91.948,35.814 91.948,28.492 92.92,27.52 92.92,25.126 94.03,24.016 94.707,24.016 95,23.724 95.739,23.724 95.864,23.599 96.134,23.599 96.407,23.326 96.936,23.326 97.19,23.072 97.593,23.072 v1@98.038,22.627
  other v2: 91.694,36.068
NetU1_D3: U1.D3 U4.18 U5.18 | length 57.6
  Top Layer w0.127: U1.D3@66.23,31.216 v1(66.63,31.616) ; U5.18@93.828,40.194 93.828,37.236 v1(94.107,36.957) ; v1(99.822,22.754) 100.076,22.754 100.686,22.144 U4.18@100.686,21.292
  Bottom Layer w0.127: v1(66.63,31.616) 67.018,32.004 67.018,32.855 68.363,34.2 68.381,34.2 68.535,34.353 69.449,34.353 70.211,35.115 70.499,35.115 70.689,35.306 71.844,35.306 73.197,36.659 73.197,37.389 74.105,38.297 74.105,38.424 74.94,38.424 75.886,39.37 79.861,39.37 81.449,37.782 85.339,37.782 85.403,37.846 86.36,37.846 87.122,38.608 91.186,38.608 92.583,37.211 93.345,37.211 93.853,36.703 ; v1(94.107,36.957) 93.853,36.703 ; v1(99.822,22.754) 99.334,23.242 98.58,23.242 98.052,23.77 97.21,23.77 97.147,23.834 96.885,23.834 96.385,24.334 96.385,25.675 95.623,26.437 94.598,26.437 93.853,27.182 93.853,36.703
NetU1_F2: U1.F2 U4.16 U5.16 | length 66.8
  Top Layer w0.127: U1.F2@64.63,32.016 65.024,31.622 v1(65.024,30.816) ; v1(92.011,23.05) 92.731,23.77 96.585,23.77 ; U5.16@95.504,40.118 95.504,36.957 95.822,36.639 95.631,36.449 v2(95.885,36.449) ; v1(96.11,27.2) 96.585,26.725 96.585,23.77 ; U4.16@102.286,21.292 102.286,22.062 101.048,23.3 100.5,23.3 100.03,23.77 96.585,23.77
  Bottom Layer w0.127: v1(65.024,30.816) 65.323,30.816 65.659,30.48 65.659,30.204 65.405,29.95 65.405,29.724 65.081,29.4 64.834,29.4 63.627,28.194 63.627,27.763 64.579,26.811 64.579,26.607 64.872,26.314 67.057,26.314 67.255,26.117 69.387,26.117 70.337,25.167 72.812,25.167 74.928,23.05 v1(92.011,23.05) ; v2(95.885,36.449) 95.631,36.449 94.742,35.56 94.742,28.068 95.61,27.2 v1(96.11,27.2)
NetU1_G3: U1.G3 U4.37 U5.37 | length 64.4
  Top Layer w0.127: U1.G3@63.83,31.216 v1(64.211,31.598) ; v1(69.215,34.798) 69.215,34.163 69.85,33.528 69.85,32.654 v1(70.04,32.464) ; v1(80.518,30.988) 81.407,30.099 84.328,30.099 84.709,30.48 85.465,30.48 86.622,31.637 90.874,31.637 90.888,31.623 92.837,31.623 93.828,30.632 93.828,27.915 92.202,26.289 92.202,25.841 90.932,24.571 90.932,21.282 91.757,20.457 91.757,18.881 92.202,18.437 92.202,18.309 96.647,13.864 97.409,13.864 100.686,10.587 U4.37@100.686,9.738
  Bottom Layer w0.127: v1(64.211,31.598) 64.262,31.648 64.262,33.147 65.341,34.227 66.447,34.227 66.638,34.417 68.199,34.417 68.236,34.454 68.276,34.454 68.62,34.798 v1(69.215,34.798) ; v1@70.104,32.385 70.104,31.115 70.802,30.416 71.868,30.416 72.376,30.924 74.894,30.924 75.381,30.438 76.975,30.438 77.059,30.353 79.883,30.353 v1(80.518,30.988)
NetU1_P11: U1.P11 U9.5 | length 13.4
  Top Layer w0.127: U9.5@49.403,20.447 49.89,19.96 50.04,19.96 v1(50.3,19.7) ; U9.5@49.582,20.447 U9.5@50.103,20.447 ; U1.P11@58.23,24.816 58.4,24.646 58.4,24.446 v1@58.875,23.971
  Bottom Layer w0.127: v1(50.3,19.7) 50.56,19.96 53.566,19.96 54.466,20.86 54.864,20.86 55.435,21.432 55.435,21.548 56.223,22.335 56.458,22.335 58.083,23.961 v1@58.991,23.961
  other v1: 58.8,24
NetU1_R10: U1.R10 U9.2 | length 19.4
  Top Layer w0.127: v1(41.6,25.1) 41.317,24.817 41.317,24.468 41.31,24.46 41.31,24.054 41.317,24.046 41.317,23.535 41.717,23.135 U9.2@41.975,23.135 ; v1@57.023,25.209 U1.R10@57.43,25.616
  Bottom Layer w0.127: v1(41.6,25.1) 43.226,25.1 43.926,24.4 52.254,24.4 52.31,24.456 53.197,24.456 54.289,25.548 56.691,25.548 v1(57.023,25.216)
NetU1_T9: U1.T9 U9.6 | length 20.7
  Top Layer w0.127: v1(46.101,25.675) 46.101,24.799 47.182,23.718 47.182,22.373 47.838,21.717 U9.6@49.185,21.717 ; U9.6@49.074,21.717 U9.6@49.185,21.717 ; U9.6@49.828,21.717 U9.6@49.185,21.717 ; U1.T9@56.63,26.416 56.79,26.416 57.188,26.018 v1(57.823,26.018)
  Bottom Layer w0.127: v1(46.101,25.675) 46.438,25.338 52.551,25.338 53.269,26.056 53.827,26.056 54.227,26.455 55.037,26.455 55.437,26.056 57.171,26.056 57.234,25.993 57.76,25.993 v1@57.823,26.056
NetU1_T14: U1.T14 U2.12 | length 48.4
  Top Layer w0.127: 41.014,18.2 41.844,19.03 42.178,19.03 42.94,19.792 43.439,19.792 44.07,20.423 44.07,21.293 v1(44.642,21.865) ; v1(56.274,22.779) 56.274,22.772 U1.T14@56.63,22.416
  Top Layer w0.254: U2.12@30.23,39.156 30.23,38.37 31.119,37.481 33.758,37.481 34.301,36.938 34.601,36.938 34.904,36.634 38.164,36.634 38.62,36.178 38.62,34.853 38.636,34.837 38.636,25.536 38.2,25.1 38.2,20 40,18.2 41.014,18.2
  Bottom Layer w0.127: v1(44.642,21.865) 44.907,21.6 54.157,21.6 54.618,22.061 55.175,22.061 55.531,22.416 55.923,22.416 v1@56.261,22.754
NetU1_U13: U1.U13 U2.19 | length 37.9
  Top Layer w0.127: U2.19@32.98,40.906 33.524,40.906 33.9,40.53 33.9,39.7 34.856,38.744 38.356,38.744 v1(38.7,38.4)
  Top Layer w0.254: v1(39.7,38.9) 39.7,38.549 40.7,37.549 40.7,28.1 v1(46.3,22.5) ; v1(53.2,22.7) 53.739,22.162 54.18,22.162 54.818,22.8 55.414,22.8 U1.U13@55.83,23.216
  Bottom Layer w0.254: v1(38.7,38.4) 39.2,38.9 v1(39.7,38.9) ; v1(46.3,22.5) 53,22.5 v1(53.2,22.7)
NetU1_U14: U1.U14 U2.18 | length 43.1
  Top Layer w0.127: U2.18@32.98,40.406 33.524,40.406 33.63,40.3 33.63,39.5 34.786,38.344 37.981,38.344 39.729,36.596 39.729,25.772 40.2,25.3 v1(40.2,20.187)
  Top Layer w0.254: v1(53.721,20.828) 53.721,21.164 54.681,22.124 55.163,22.124 55.455,22.416 U1.U14@55.83,22.416
  Bottom Layer w0.254: v1(40.2,20.187) 41.287,19.1 45.598,19.1 46.445,19.947 47.647,19.947 47.996,20.296 51.905,20.296 52.437,20.828 v1(53.721,20.828)
NetU1_U15: U1.U15 U2.23 | length 40.4
  Top Layer w0.127: U2.23@32.98,42.906 33.594,42.906 34.408,42.092 34.408,39.91 34.868,39.45 39.95,39.45 41.07,38.33 41.07,28.73 46.8,23 46.8,22.3 47.3,21.8 v1(47.3,20.8) ; v1(54.991,21.616) U1.U15@55.83,21.616
  Bottom Layer w0.127: v1(47.3,20.8) 51.608,20.8 51.975,21.167 53.267,21.167 53.446,21.346 54.262,21.346 54.464,21.548 54.732,21.548 54.946,21.762 v1(54.991,21.616)
NetU1_U16: U1.U16 U2.20 | length 46.5
  Top Layer w0.127: U2.20@32.98,41.406 33.594,41.406 34.154,40.846 34.154,39.805 34.859,39.1 38.7,39.1 39.983,37.817 39.983,26.232 40.5,25.714 40.5,20.6 40.67,20.43 v1(40.67,18.944) ; v1(54.356,19.706) 54.356,20.341 54.831,20.816 U1.U16@55.83,20.816
  Bottom Layer w0.127: v1(40.67,18.944) 41.214,18.4 41.5,18.4 42.988,16.912 51.943,16.912 54.356,19.325 v1(54.356,19.706)
RXM: J1.6 U2.4 | length 14.6
  Top Layer w0.254: J1.6@17.649,44.08 J1.6@17.72,44.08 ; v1(25.472,43.628) 25.52,43.628 26.235,42.913 26.235,42.865 27.194,41.906 U2.4@27.98,41.906
  Bottom Layer w0.254: J1.6@17.649,44.08 17.649,45.549 19.1,47 20.667,47 23.567,44.1 25,44.1 v1(25.472,43.628)
RXP: J1.4 U2.5 | length 17.8
  Top Layer w0.254: v1(24.486,43.314) 24.896,42.904 25.496,42.904 26.994,41.406 U2.5@27.98,41.406
  Bottom Layer w0.254: J1.4@17.649,40.016 18.9,41.267 18.9,45.9 19.5,46.5 20.628,46.5 23.409,43.719 24.081,43.719 v1(24.486,43.314)
TXM: J1.10 U2.6 | length 8.6
  Top Layer w0.254: v1(24.6,40) 25.8,40 26.706,40.906 U2.6@27.98,40.906 U2.6@27.974,40.9
  Bottom Layer w0.254: J1.10@20.189,41.032 21.221,40 v1(24.6,40)
TXP: J1.12 U2.7 | length 11.6
  Top Layer w0.254: v1(26.4,39.6) 27.206,40.406 U2.7@27.98,40.406
  Bottom Layer w0.254: J1.12@20.189,45.096 21.5,43.785 21.5,41.8 22.6,40.7 25.3,40.7 v1(26.4,39.6)
VIN: C65.2 J4.6 J7.1 U10.1 | length 97.8
  Top Layer w0.508: J7.1@11.273,8.327 13.737,5.863 16.872,5.863 18.372,4.363 24.463,4.363 v2(25.754,5.654) 25.754,8.054 27.6,9.9 U10.1@29,9.9
  Bottom Layer w0.508: v2(25.754,5.654) 25.909,5.5 66.9,5.5 70.4,2 79.809,2 81.026,0.783 96.033,0.783 J4.6@97.79,2.54
pads on no net: J1.0 J1.1 J1.2 J1.3 J1.5 J1.11 J7.3 J8.2 J8.3 J8.6 RA14.1 RA14.4 RA14.5 RA14.8 RA16.3 RA16.6 RA20.6 U1.A9 U1.A10 U1.A11 U1.A12 U1.A13 U1.A14 U1.A16 U1.B7 U1.B8 U1.B9 U1.B10 U1.B11 U1.B12 U1.B13 U1.B15 U1.B16 U1.C9 U1.C10 U1.C11 U1.C12 U1.C13 U1.C15 U1.C17 U1.D13 U1.D15 U1.D17 U1.E17 U1.F16 U1.G1 U1.H16 U1.L14 U1.N14 U1.N15 U1.P6 U1.P7 U1.P9 U1.P10 U1.P15 U1.P16 U1.R1 U1.R5 U1.R6 U1.R8 U1.R9 U1.R11 U1.R12 U1.R17 U1.T1 U1.T6 U1.T8 U1.T16 U1.T17 U1.U7 U1.U8 U2.13 U2.14 U2.21 U2.22 U2.26 U2.27 U2.29 U4.40 U5.40 U6.1 U6.2 U7.1 U7.2

## Polygon pours and split planes (outlines as drawn)
GND on Ground Plane (split plane): 3.175,52.83 116.375,52.83 117.6,51.605 117.6,40.64 117.609,40.54 117.638,40.445 117.686,40.356 117.749,40.279 120.14,37.889 120.14,5.291 117.749,2.901 117.686,2.824 117.638,2.735 117.609,2.64 117.6,2.54 117.6,0.51 3.175,0.51 3.158,0.509 2.943,0.518 2.712,0.549 2.485,0.599 2.263,0.669 2.048,0.758 1.841,0.865 1.645,0.99 1.461,1.132 1.289,1.289 1.132,1.461 0.99,1.645 0.865,1.841 0.758,2.048 0.669,2.263 0.599,2.485 0.549,2.712 0.518,2.943 0.509,3.158 0.51,3.175 0.51,50.166 0.509,50.183 0.518,50.398 0.549,50.629 0.599,50.856 0.669,51.078 0.758,51.293 0.865,51.499 0.99,51.696 1.132,51.88 1.289,52.052 1.461,52.209 1.645,52.351 1.841,52.476 2.048,52.583 2.263,52.672 2.485,52.742 2.712,52.792 2.943,52.823 3.151,52.832
3V3 on Power Plane (split plane): 3.175,52.83 116.375,52.83 117.6,51.605 117.6,40.64 117.609,40.54 117.638,40.445 117.686,40.356 117.749,40.279 120.14,37.889 120.14,5.291 117.749,2.901 117.686,2.824 117.638,2.735 117.609,2.64 117.6,2.54 117.6,0.51 3.175,0.51 3.158,0.509 2.943,0.518 2.712,0.549 2.485,0.599 2.263,0.669 2.048,0.758 1.841,0.865 1.645,0.99 1.461,1.132 1.289,1.289 1.132,1.461 0.99,1.645 0.865,1.841 0.758,2.048 0.669,2.263 0.599,2.485 0.549,2.712 0.518,2.943 0.509,3.158 0.51,3.175 0.51,50.166 0.509,50.183 0.518,50.398 0.549,50.629 0.599,50.856 0.669,51.078 0.758,51.293 0.865,51.499 0.99,51.696 1.132,51.88 1.289,52.052 1.461,52.209 1.645,52.351 1.841,52.476 2.048,52.583 2.263,52.672 2.485,52.742 2.712,52.792 2.943,52.823 3.151,52.832

## Other copper
Bottom Layer:
  rectangle net GND: 26.4,5.9 46.5,13.2
  text "Secret JTAG port" at 115.535,26.9 h2.54
  text "G" at 25.2,7.4 h10

## Silkscreen, mask and mechanical layers (free items; w line width, h text height)
Top Overlay:
  circle w0.127: c67.31,50.8 r2.667
  circle w0.127: c118.11,35.56 r2.667
  circle w0.127: c15.748,2.54 r2.667
  circle w0.127: c15.748,50.8 r2.667
  circle w0.127: c71.501,19.325 r0.762
  circle w0.127: c47.8,12.319 r0.762
  circle w0.127: c42.926,46.249 r0.762
  lines w0.127: 71.501,18.563 71.501,18.309 73.025,16.785 ; 115.443,7.62 cw(c118.11,7.62) 116.776,5.31
  text "Rascal 1.1" at 52.705,50.8 h2.54
  text "2012-01-30" at 52.705,48.408 h2.54
  text "5" at 103.64,48.182 h2.54 r90
  text "3" at 108.748,48.181 h2.54 r90
  text "9" at 91.954,48.111 h2.54 r90
  text "8" at 94.488,48.116 h2.54 r90
  text "6" at 101.12,48.111 h2.54 r90
  text "2" at 111.292,48.1 h2.54 r90
  text "7" at 98.552,48.063 h2.54 r90
  text "4" at 106.184,48.006 h2.54 r90
  text "11" at 86.866,47.265 h2.54 r90
  text "13" at 81.82,47.038 h2.54 r90
  text "12" at 84.353,46.96 h2.54 r90
  text "10" at 89.421,46.95 h2.54 r90
  text "GND" at 50.5,46.545 h1.27
  text "GND" at 79.286,44.979 h2.54 r90
  text "TX 1" at 113.815,44.966 h2.54 r90
  text "RX 0" at 116.38,44.793 h2.54 r90
  text "A/D REF" at 76.746,41.07 h2.54 r90
  text "1.0 V" at 73.279,16.658 h1.27
  text "3.3 V" at 49.4,12.4 h1.27
  text "G" at 16.08,7.4 h10
  text "DTXD" at 57.91,4.175 h2.54 r90
  text "DRXD" at 60.41,4.175 h2.54 r90
  text "GND" at 68.06,4.175 h2.54 r90
  text "RST" at 85.884,4.191 h2.54 r90
  text "3.3 V" at 88.417,4.191 h2.54 r90
  text "5 V" at 90.93,4.191 h2.54 r90
  text "GND" at 93.485,4.191 h2.54 r90
  text "GND" at 96.018,4.191 h2.54 r90
  text "VIN" at 98.552,4.191 h2.54 r90
  text "A0" at 103.537,4.191 h2.54 r90
  text "A1" at 106.07,4.191 h2.54 r90
  text "A2" at 108.583,4.191 h2.54 r90
  text "A3" at 111.138,4.191 h2.54 r90
  text "SDA" at 113.671,4.191 h2.54 r90
  text "SCL" at 116.205,4.191 h2.54 r90
  text "rascal micro" at 1.4,1.1 h2.5
  text "5 V" at 23.9,0.8 h1.27
Bottom Overlay:
  text "A/D REF" at 76.746,49.214 h2.54 r90
  text "GND" at 79.286,49.214 h2.54 r90
  text "13" at 81.82,49.214 h2.54 r90
  text "12" at 84.353,49.214 h2.54 r90
  text "11" at 86.866,49.214 h2.54 r90
  text "10" at 89.421,49.214 h2.54 r90
  text "9" at 91.954,49.214 h2.54 r90
  text "8" at 94.488,49.214 h2.54 r90
  text "7" at 98.552,49.214 h2.54 r90
  text "6" at 101.12,49.214 h2.54 r90
  text "5" at 103.64,49.214 h2.54 r90
  text "4" at 106.184,49.214 h2.54 r90
  text "3" at 108.748,49.214 h2.54 r90
  text "2" at 111.292,49.214 h2.54 r90
  text "TX 1" at 113.815,49.214 h2.54 r90
  text "RX 0" at 116.38,49.214 h2.54 r90
  text "3.3 V" at 88.417,9.291 h2.54 r90
  text "GND" at 93.485,8.227 h2.54 r90
  text "GND" at 96.018,8.227 h2.54 r90
  text "SDA" at 113.671,7.88 h2.54 r90
  text "RST" at 85.884,7.675 h2.54 r90
  text "SCL" at 116.205,7.578 h2.54 r90
  text "VIN" at 98.552,7.329 h2.54 r90
  text "5 V" at 90.93,7.183 h2.54 r90
  text "A0" at 103.537,6.646 h2.54 r90
  text "A2" at 108.583,6.637 h2.54 r90
  text "A3" at 111.138,6.559 h2.54 r90
  text "A1" at 106.07,6.332 h2.54 r90
Mechanical 1:
  the board outline again, w0.076
  text "Licensed under the Creative Commons Attribution-Share Alike 3.0 United States license" at 1.016,57.933 h1.52
  text "http://creativecommons.org/licenses/by-sa/3.0/us/" at 1.016,56.282 h1.52
  text "Copyright Rascal Micro LLC" at 1.016,54.631 h1.52